# Altium PCB Sender.PcbDoc
Units mm, origin at the board's own origin, x right, y up, seen from the top; angles counter-clockwise.
Board outline 44.7 x 21.02 mm, 2 copper layers (Top Layer, Bottom Layer), stack 1.569 mm thick; 64 components, 31 nets, 185 pads, 451 vias.
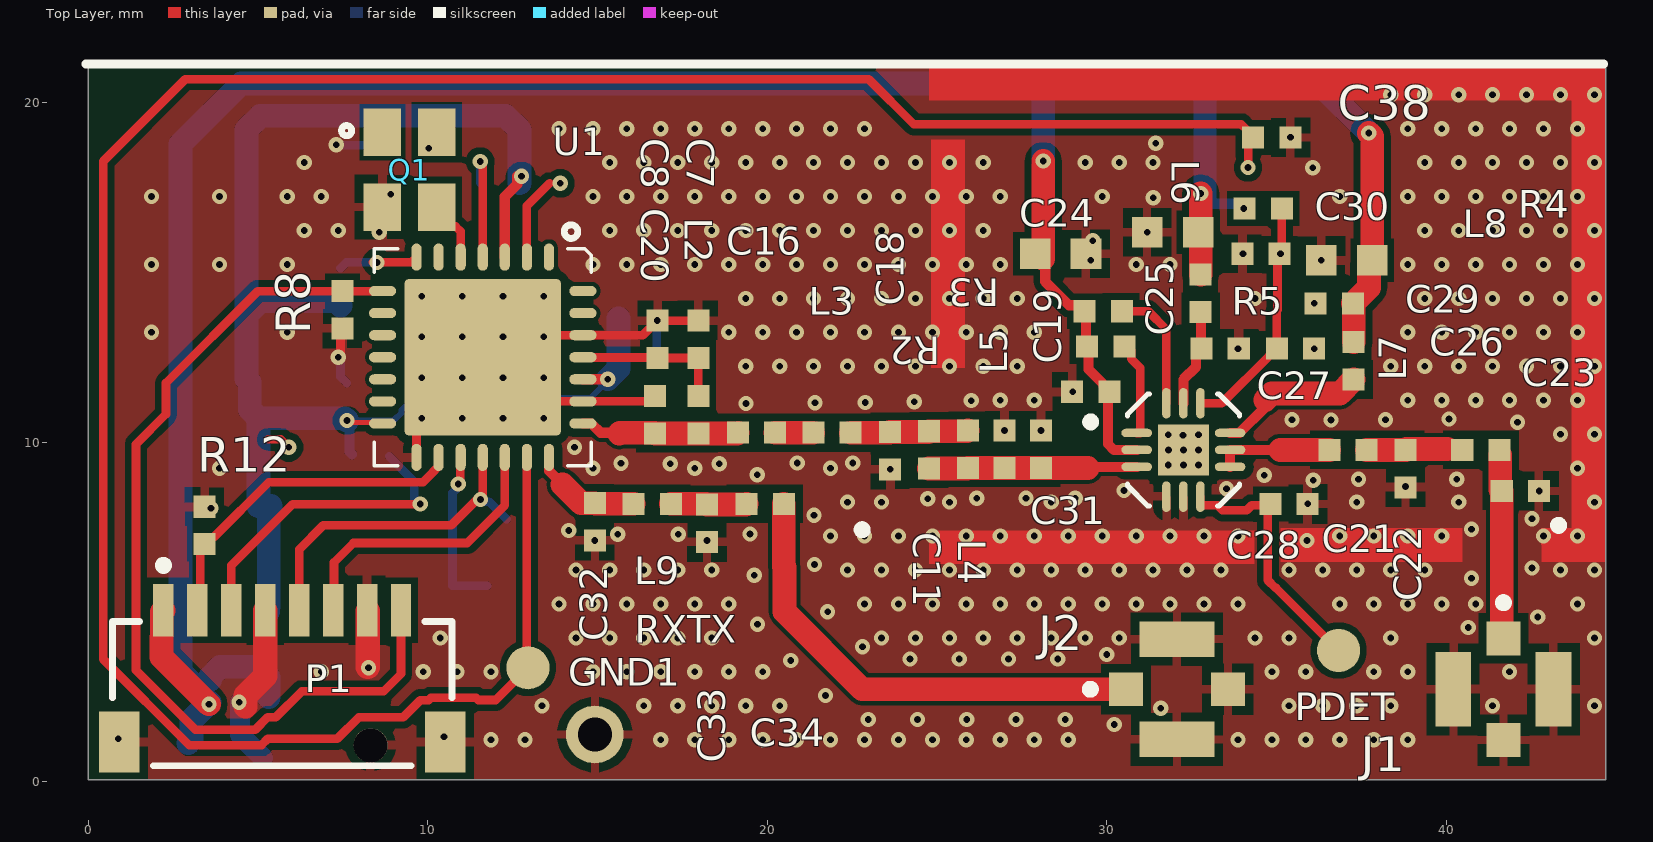
[diagram p0: Top Layer view]
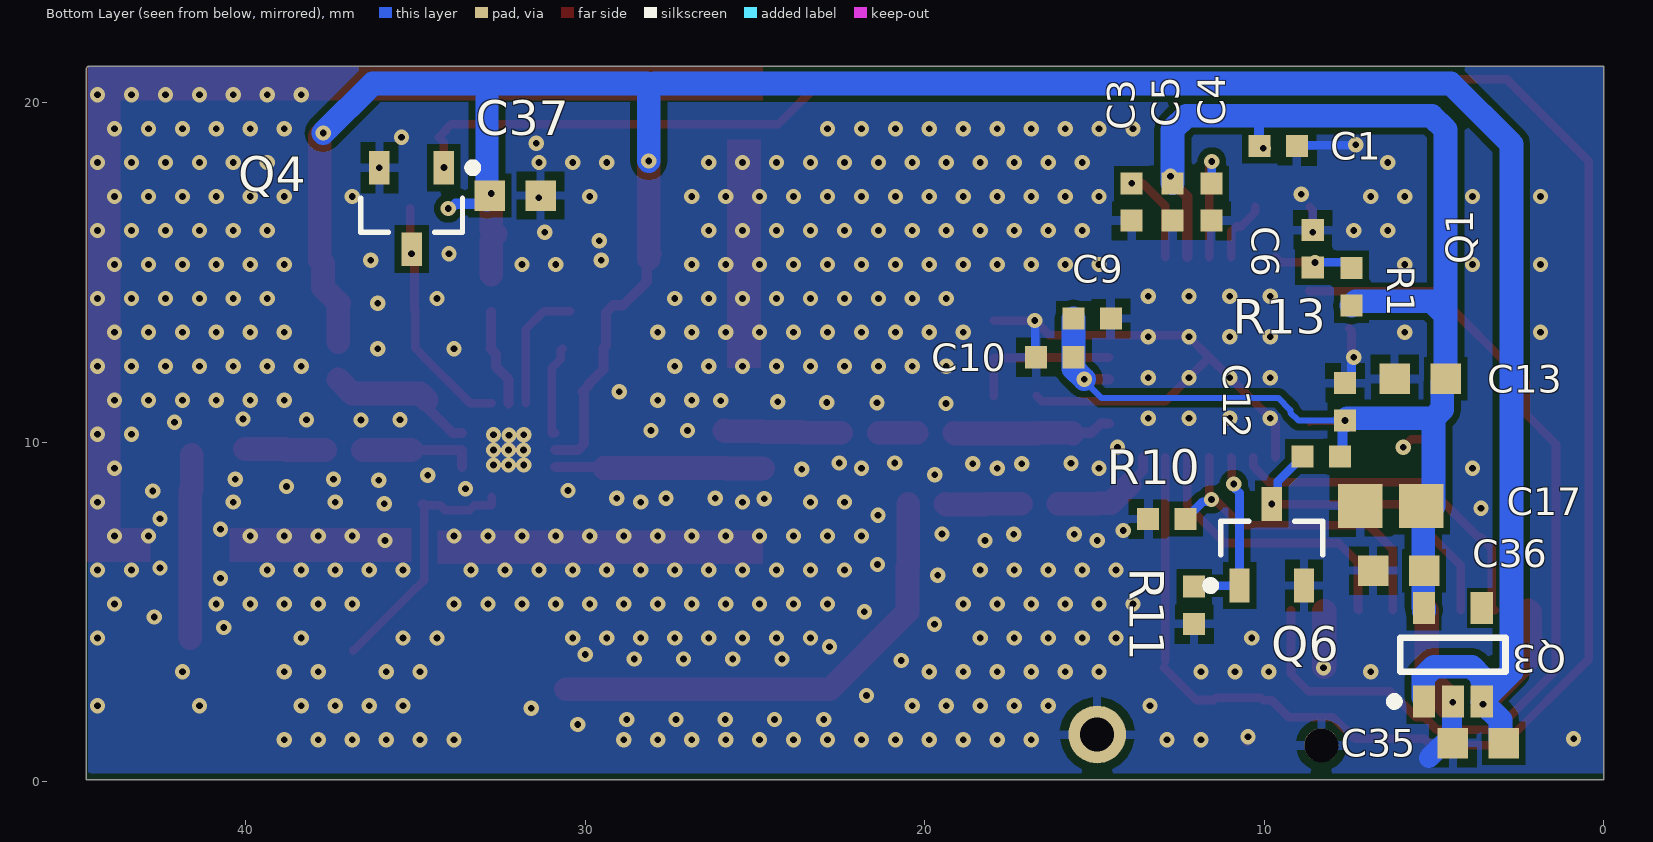
[diagram p1: Bottom Layer view, seen from below]

## Layer stack, top to bottom
Top Solder: solder mask 0.0254, SM-001, Dk 4
Top Layer: signal copper 0.035
Dielectric 1: core 1.4986, Core-043, Dk 4.3
Bottom Layer: signal copper 0.035
Bottom Solder: solder mask 0.0254, SM-001, Dk 4

## Board outline
0,0.064 0,21.082 44.64,21.082 44.704,21.018 44.704,0.064

## Design rules (kind name [scope] priority, off if disabled: settings)
Clearance Clearance_5 [InNetClass('RF') vs InNet('NetC28_1')] p1: gap=0.2 ignorepadtopadclearanceinfootprint=TRUE
Clearance Clearance_4 [InNetClass('RF') vs InNet('VDD_RFS')] p2: gap=0.2 ignorepadtopadclearanceinfootprint=TRUE
Clearance Clearance_3 [HasFootprint('vqfn28_6x6mm') vs InNet('VDD_RFS')] p3: gap=0.2 ignorepadtopadclearanceinfootprint=TRUE
Clearance Clearance_2 [((Not InAnyNet) And IsPad) vs InNet('GND')] p4: gap=0.12 ignorepadtopadclearanceinfootprint=FALSE
Clearance [InNetClass('RF') vs InNet('GND')] p5: gap=0.12 ignorepadtopadclearanceinfootprint=TRUE
Clearance Clearance_1 [All] p6: gap=0.175 ignorepadtopadclearanceinfootprint=TRUE
HoleToHoleClearance [All] p1: gap=0.1 allowstackedmicrovias=TRUE
MinimumSolderMaskSliver [All] p1: minsoldermaskwidth=0
PlaneClearance [InNetClass('RF')] p1: clearance=0.12
PolygonConnect PolygonConnect_1 [IsVia vs InNet('GND')] p1: connectstyle=Direct reliefconductorwidth=0.254 reliefentries=4 polygonreliefangle="90 Angle" airgapwidth=0.254
PolygonConnect [All] p2: connectstyle=Relief reliefconductorwidth=0.254 reliefentries=4 polygonreliefangle="90 Angle" airgapwidth=0.254
RoutingVias [All] p1: holewidth=0.198 width=0.45 viastyle="Through Hole" minholewidth=0.198 minwidth=0.45 maxholewidth=0.6 maxwidth=1.2
SilkToSilkClearance [All] p1: silktosilkclearance=0.1
SilkToSolderMaskClearance [IsPad] p1: minsilkscreentomaskgap=0.1 clearancetoexposedcopper=TRUE
SolderMaskExpansion SolderMaskExpansion_1 [IsVIA] p1: expansion=0.102 istentingtop=TRUE
SolderMaskExpansion [All] p2: expansion=0.102 istentingtop=FALSE
Width Width_1 [InNetClass('RF')] p1: maxlimit=1.27 minlimit=0.1 preferedwidth=0.7 minimp=50.000000 maximp=50.000000 favimp=50.000000
Width Width_2 [InNetClass('POW')] p2: maxlimit=1.27 minlimit=0.15 preferedwidth=0.3
Width [All] p3: maxlimit=1.27 minlimit=0.254 preferedwidth=0.254
25 further rules are at their usual default settings.

## Classes and differential pairs
net class RF: NetC11_1 NetC11_2 NetC16_1 NetC16_2 NetC21_1 NetC21_2 NetC23_2 NetC26_1 NetC32_2 NetC33_2 NetC34_1 NetL7_1
net class POW: 3V3 5V

## Components (designator, comment, footprint, x,y, rotation, side; value= is the part's Value field where it differs from the comment)
C1 "Cap" rlc_402_smd#1 9.588,18.732 r0 bottom value=10nF
C3 "Cap" rlc_402_smd#1 13.906,17.081 r90 bottom value=100nF
C4 "Cap" rlc_402_smd#1 11.557,17.081 r90 bottom value=100nF
C5 "Cap" rlc_402_smd#1 12.7,17.081 r90 bottom value=100nF
C6 "Cap" rlc_402_smd#1 8.572,15.706 r90 bottom value=1nF
C7 "Cap" rlc_402_smd#1 17.97,13.039 r270 top value=10nF
C8 "Cap" rlc_402_smd#1 16.764,13.039 r270 top value=100pF
C9 "Cap" rlc_402_smd#1 15.071,13.652 r0 bottom value=100pF
C10 "Cap" rlc_402_smd#1 16.171,12.509 r180 bottom value=100nF
C11 "Cap" rlc_402_smd#1 24.765,9.779 r90 top value=4.7pF
C12 "Cap" rlc_402_smd#1 7.62,11.198 r270 bottom value=100nF
C13 "Cap Semi" rlc_603_smd#1 5.409,11.874 r180 bottom value=1uF
C16 "Cap" rlc_402_smd#1 19.685,10.287 r180 top value=33pF
C17 "Cap" rlc_805_smd 6.275,8.128 r180 bottom value=10uF
C18 "Cap" rlc_402_smd#1 23.622,9.757 r90 top value=4.7pF
C19 "Cap" rlc_402_smd#1 28.067,9.801 r270 top value=12pF
C20 "Cap" rlc_402_smd#1 16.7,10.817 r270 top value=3.3pF
C21 "Cap" rlc_402_smd#1 37.106,9.779 r180 top value=220pF
C22 "Cap" rlc_402_smd#1 38.798,9.229 r90 top value=4.7pF
C23 "Cap" rlc_402_smd#1 42.186,8.572 r180 top value=10pF
C24 "Cap" rlc_603_smd#1 28.639,15.557 r0 top value=1uF
C25 "Cap" rlc_603_smd#1 31.941,16.192 r0 top value=1uF
C26 "Cap" rlc_402_smd#1 33.337,12.763 r0 top value=3.3pF
C27 "Cap" rlc_402_smd#1 35.56,12.763 r180 top value=100pF
C28 "Cap" rlc_402_smd#1 35.369,8.191 r180 top value=100pF
C29 "Cap" rlc_402_smd#1 36.703,14.097 r0 top value=1nF
C30 "Cap" rlc_603_smd#1 37.072,15.367 r0 top value=4.7uF
C31 "Cap" rlc_402_smd#1 29.527,11.493 r0 top value=100pF
C32 "Cap" rlc_402_smd#1 14.922,7.662 r90 top value=4.7pF
C33 "Cap" rlc_402_smd#1 18.224,7.62 r90 top value=10pF
C34 "Cap" rlc_402_smd#1 19.939,8.191 r180 top value=220pF
C35 "Cap Semi" rlc_603_smd#2 3.695,1.143 r180 bottom value=1uF
C36 "Cap Semi" rlc_603_smd#2 6.044,6.223 r180 bottom value=1uF
C37 "Cap" rlc_603_smd#2 32.067,17.272 r180 bottom value=1uF
C38 "Cap" rlc_402_smd#2 34.861,18.986 r0 top value=100pF
GND1 "Test Pin" pin_1mm 14.922,1.397 r90 top
J1 "73412-0110" MOLX-73412-0110_V 41.685,2.73 r180 top
J2 "73412-0110" MOLX-73412-0110_V 32.067,2.73 r270 top
L2 "Inductor" rlc_402_smd#1 17.97,10.817 r90 top value=33nH
L3 "Inductor" rlc_402_smd#1 21.907,10.287 r0 top value=1.85nH
L4 "Inductor" rlc_402_smd#1 25.908,9.801 r270 top value=2.2nH
L5 "Inductor" rlc_402_smd#2 26.987,9.801 r270 top value=5.6nH
L6 "Inductor" rlc_402_smd#2 32.766,14.393 r270 top value=12nH
L7 "Inductor" rlc_402_smd#1 37.274,12.404 r90 top value="22nH 2285626"
L8 "Inductor" rlc_402_smd#2 41.021,9.779 r0 top value=1.85nH
L9 "Inductor" rlc_402_smd#2 16.615,8.191 r0 top value=2.2nH
P1 "SM08B-SRSS-TB(LF)(SN)" JST-SM08B-SRSS-TB_V 5.715,2.603 r0 top
PDET "Test Pin" pin_SMD 36.83,3.873 r90 top
Q1 "I537" nd3225da 9.461,18.034 r270 top
Q3 "TPS70936" SOT-23-5 4.445,3.746 r90 bottom
Q4 "IRFML8244TRPbF" SOT23_MOSFET 35.115,16.891 r270 bottom
Q6 "IRFML8244TRPbF" SOT23_MOSFET 9.779,6.985 r90 bottom
R1 "Resistor" rlc_402_smd#1 7.429,14.583 r270 bottom value=100R
R2 "Resistor" rlc_402_smd#2 29.972,12.827 r180 top value=1.8k
R3 "Resistor" rlc_402_smd#2 29.898,13.863 r180 top value=2k
R4 "Resistor" rlc_402_smd#1 34.608,16.891 r180 top value=1k
R5 "Resistor" rlc_402_smd#2 34.544,15.557 r0 top value=1k
R8 "Resistor" rlc_402_smd#2 7.493,13.906 r270 top value=200R
R10 "Resistor" rlc_402_smd#2 12.869,7.747 r0 bottom value=200R
R11 "Resistor" rlc_402_smd#2 12.065,5.207 r270 bottom value=200R
R12 "Resistor" rlc_402_smd#2 3.429,7.556 r90 top value=200R
R13 "Resistor" rlc_402_smd#2 8.319,9.588 r0 bottom value=100R
RXTX "Test Pin" pin_SMD 12.954,3.365 r90 top
U1 "SX1276" vqfn28_6x6mm 11.62,12.509 r270 top

## Footprints (in the part's own frame and the unit in brackets; to place one, negate y for a bottom-side part, rotate by r counter-clockwise, add the part's x,y. Pads: shape width x height; smd on the part's side, far side on the other; paste and mask are expansions set on the pad)
JST-SM08B-SRSS-TB_V [mm] "SMD, 8-Leads, Body 10x4.25mm, Pitch 1mm"
  rect 0.6x1.55 smd: 1(-3.5,2.45) 2(-2.5,2.45) 3(-1.5,2.45) 4(-0.5,2.45) 5(0.5,2.45) 6(1.5,2.45) 7(2.5,2.45) 8(3.5,2.45)
  rect 1.2x1.8 smd: MP1(-4.8,-1.425) MP2(4.8,-1.425)
  silkscreen extent -5,-2.12 5,3.9, body extent -5,-2.12 5,2.83, height 2.96
MOLX-73412-0110_V [mm] "MCRF, 4-Leads, Body 2.6x2.6mm"
  rect 1x1 smd: 1(0,-1.5) 3(0,1.5)
  rect 1.05x2.2 smd: 2(-1.475,0) 4(1.475,0)
  silkscreen extent -0.13,-2.67 0.12,-2.43, body extent -1.3,-1.3 1.3,1.3, height 1.3
nd3225da [mm] "Crystal SMD 3.2x2.5mm"
  rect 1.4x1.1 smd mask+0.05: 1(-1.1,-0.8) 2(1.1,-0.8) 3(1.1,0.8) 4(-1.1,0.8)
  silkscreen extent -1.3,-2 -1,-1.7, body extent -1.6,-1.25 1.6,1.25, height 1
pin_1mm [mm] "Generic Pin 1.1mm; 1 Lead"
  round 1.7 hole 1: 1(0,0)
pin_SMD [mm] "Generic Pin; 1 pin SMD"
  round 1.27 smd: 1(0,0)
rlc_402_smd#1 [mm] "Chip SMD component 402; Body 1.0 x 0.5 mm (LxW typ)"
  rect 0.65x0.65 smd: 1(-0.55,0) 2(0.55,0)
rlc_402_smd#2 [mm] "Chip SMD component 402; Body 1.0 x 0.5 mm (LxW typ)"
  rect 0.65x0.65 smd mask+0.05: 1(-0.55,0) 2(0.55,0)
rlc_603_smd#1 [mm] "Chip SMD component 603; Body 1.6 x 0.8mm (LxW typ)"
  rect 0.9x0.9 smd: 1(-0.75,0) 2(0.75,0)
rlc_603_smd#2 [mm] "Chip SMD component 603; Body 1.6 x 0.8mm (LxW typ)"
  rect 0.9x0.9 smd paste+0 mask+0.05: 1(-0.75,0) 2(0.75,0)
rlc_805_smd [mm] "Chip SMD component 805; Body 2.0 x 1.25 mm (LxW typ)"
  rect 1.3x1.3 smd: 1(-0.9,0) 2(0.9,0)
SOT23_MOSFET [mm] "SOT23, 3-Leads, Body 2.92x2.37mm, Pitch 0.95mm, IPC Medium Density"
  rect 1x0.6 smd: D(1.2,0) G(-1.2,0.95) S(-1.2,-0.95)
  silkscreen extent -1.32,-1.5 0.7,1.92, body extent -0.7,-1.52 0.7,1.52, height 1.12
SOT-23-5 [mm] "SOT23, 5-Leads, Body 2.90x2.79mm, Pitch 0.85mm, IPC Medium Density"
  rect 0.95x0.65 smd: 1(-1.375,0.85) 2(-1.375,0) 3(-1.375,-0.85) 4(1.375,-0.85) 5(1.375,0.85)
  silkscreen extent -1.5,-1.55 0.5,1.85, body extent -0.9,-1.55 0.9,1.55, height 1.3
vqfn28_6x6mm [mm] "28 Leads, Body 6.0x6.0mm, Pitch 0.65mm, VQFN28"
  oval 0.8x0.3 smd: 1(-2.95,1.95) 2(-2.95,1.3) 3(-2.95,0.65) 4(-2.95,0) 5(-2.95,-0.65) 6(-2.95,-1.3) 7(-2.95,-1.95) 15(2.95,-1.95) 16(2.95,-1.3) 17(2.95,-0.65) 18(2.95,0) 19(2.95,0.65) 20(2.95,1.3) 21(2.95,1.95)
  oval 0.3x0.8 smd: 8(-1.95,-2.95) 9(-1.3,-2.95) 10(-0.65,-2.95) 11(0,-2.95) 12(0.65,-2.95) 13(1.3,-2.95) 14(1.95,-2.95) 22(1.95,2.95) 23(1.3,2.95) 24(0.65,2.95) 25(0,2.95) 26(-0.65,2.95) 27(-1.3,2.95) 28(-1.95,2.95)
  rrect5% 4.6x4.6 smd: 29(0,0)
  Mechanical 15 keep-out lines w0.1: 3.5,-3.5 3.5,3.5 -3.5,3.5 -3.5,-3.5 3.5,-3.5
  silkscreen extent -3.9,-3.2 3.2,3.2, body extent -3,-3 3,3, height 1

## Part data
C1 C3 C4 C5 C6 C7 C8 C9 C10 C11 C12 C16 C17 C18 C19 C20 C21 C22 C23 C24 C25 C26 C27 C28 C29 C30 C31 C32 C33 C34 C37 C38: "Capacitor SMD", LatestRevisionDate="05-oct-2007  -  Semtech", LatestRevisionNote="Re-released for DXP Platform.", Published=8-Jun-2000, Publisher="Altium Limited"
C13 C35 C36: "Capacitor (Semiconductor SIM Model)", LatestRevisionDate="05-oct-2007  -  Semtech", LatestRevisionNote="Re-released for DXP Platform.", Published=8-Jun-2000, Publisher="Altium Limited"
GND1 PDET RXTX: library part test_pin, LatestRevisionDate="05-oct-2007  -  Semtech"
J1 J2: library part CMP-1676-00003-1, "MCRF, PCB Vertical Jack Receptacle, 50 Ohm, 4-Pin SMD, RoHS, Tape and Reel", Frequency="6 Hz", Max Operating Temperature="90 degC", Min Operating Temperature="-40 degC", Package Quantity=5000, Voltage Rating="60 V", ComponentLink1Description="Manufacturer URL", ComponentLink1URL=http://www.molex.com/, ComponentLink2Description=Datasheet, ComponentLink2URL=http://www.molex.com/webdocs/datasheets/pdf/en-us/0734120110_RF_COAX_CONNECTORS.pdf, ComponentLink3Description="Package Specification", ComponentLink3URL=http://www.molex.com/pdm_docs/sd/734120110_sd.pdf, Contact Material=Bronze, Contact Plating=Gold, DatasheetVersion=04/2016, Gender=Female, Height="1.25 mm", Impedance="50 Ohm", Length="3 mm", Mating Cycles=30, Mount="Surface Mount", Mounting Technology="Surface Mount", PackageDescription="4-Leads SMD, Body 2.6 x 2.6 mm", PackageReference=73412-0110, PackageVersion="Rev. C14, 07/2015", Packaging="Tape and Reel", Radiation Hardening=No, REACH SVHC=Unknown, RoHSCompliant=true, Voltage Rating (AC)="60 V", Width="3 mm"
L2 L3 L4 L5 L6 L7 L8 L9: "Inductor SMD", Code_IEC=1005, Code_JEITA=0402, LatestRevisionDate="05-oct-2007  -  Semtech", LatestRevisionNote="Re-released for DXP Platform.", Published=8-Jun-2000, Publisher="Altium Limited"
P1: library part CMP-2000-07082-1, "Male Header, Pitch 1 mm, 1 x 8 Position, Height 2.95 mm, -25 to 85 degC, RoHS, Tape and Reel", Manufacturer=JST, Package Description="Male Header, Pitch 1 mm, 1 x 8 Position, Height 2.95 mm", Package Reference=SM08B-SRSS-TB, Datasheet URL=http://www.jst-mfg.com/product/pdf/eng/eSR.pdf, Datasheet Version=11/2010, Manufacturer URL=http://www.jst.com/home2.html, Mounting Technology=SurfaceMount, No of Positions=8, Pitch=1mm, Style/Orientation=RightAngleHeader/Plug, Termination=Crimp, Type=ShroudedHeader
Q1: library part TCXO, "Termally Compensated External Oscillator"
Q3: library part RT9086
Q4 Q6: library part MOSFET-N, "N-Channel MOSFET", LatestRevisionDate=17-Jul-2002, LatestRevisionNote="Re-released for DXP Platform.", PackageDescription="TO, Flat Index; 3 In-Line, Axial Leads; Body Dia. 4.6mm; Lead Dia. 0.5 mm (max)", PackageReference=E3, PackageVersion=1995/1996, Published=8-Jun-2000, Publisher="Altium Limited"
R1 R2 R3 R4 R5 R8 R10 R11 R12 R13: "Resistor SMD - IEC symbol version", LatestRevisionDate="27-Jul-20  -  Semtech"
U1: "SX1276 - Low Power Integrated UHF Transceiver with loRa Modem", LatestRevisionDate="27-Jul-2009 -  Semtech"

## Free pads (board coordinates)
  oval 0.9x0.25 smd: 1(30.883,10.279) 2(30.883,9.779) 3(30.883,9.279) 7(33.633,9.279) 8(33.633,9.779) 9(33.633,10.279)
  oval 0.25x0.9 smd: 4(31.758,8.404) 5(32.258,8.404) 6(32.758,8.404) 10(32.758,11.154) 11(32.258,11.154) 12(31.758,11.154)
  round 1 hole 1 paste+1 mask+0.102: 6(8.319,1.079)
  rect 1.5x1.5 smd: 13(32.258,9.779)

## Via types
v1: diameter 0.45, hole 0.198, Top Layer to Bottom Layer, tented both sides, 451 vias

## Nets (pads, with @x,y where several pads share a name; then routed paths per layer and width w, separated by ;. In a path a pad name is that pad's centre, name@x,y a point inside that pad or via, vN(x,y) a via of type N, cw(c..) or ccw(c..) an arc to the next point about the centre after c; other vN are vias at no path point)
3V3: C1.2 C5.2 C9.2 C10.2 C12.2 C13.2 C17.2 C36.2 Q1.4 Q3.5 R1.2 R13.1 U1.3 U1.14 U1.24 | length 46.9
  Top Layer w0.15: v1(7.62,10.648) 7.679,10.588 8.642,10.588 U1.14
  Top Layer w0.3: U1.3 12.271,17.241 12.636,17.607 v1@12.636,17.843 ; U1.24 15.301,11.859 v1(15.303,11.862)
  Bottom Layer w0.18: v1(7.62,10.648) 8.997,10.648 9.231,10.882 9.231,10.954 9.589,11.312 14.8,11.312 15.303,11.816 v1(15.303,11.862)
  Bottom Layer w0.3: v1(7.62,10.648) 7.694,10.573 7.694,9.726 R13.1@7.769,9.652 ; v1(10.033,18.669) 10.16,18.796 10.16,19.621
  Bottom Layer w0.7: Q3.5@5.295,5.022 Q3.5 5.32,5.146 5.32,6.223 5.32,8.073 C17.2 5.016,8.128 5.016,10.71 ; R1.2 7.305,14.158 6.835,14.158 6.833,14.16 5.07,14.16 4.659,13.75 ; v1(7.62,10.648) 7.558,10.71 5.016,10.71 ; C5.2 12.7,17.843 12.7,19.211 12.29,19.621 10.16,19.621 5.07,19.621 4.659,19.211 4.659,13.75 ; v1(15.303,11.862) 15.621,12.18 C10.2 C9.2 ; 4.659,13.75 C13.2 4.759,11.775 4.759,10.967 5.016,10.71
  other v1: 12.763,17.843
5V: C24.1 C25.2 C29.2 C30.2 C31.2 C35.2 C37.1 L6.1 L7.2 P1.1 pad.2 Q3.1 Q3.3 R2.2 R3.2 R4.2 | length 85.8
  Top Layer w0.3: C24.1 28.189,15.257 28.189,14.737 28.888,14.038 29.173,14.038 R3.2 29.385,13.827 29.385,12.864 R2.2 29.464,12.785 29.464,12.152 29.902,11.713 29.902,11.669 C31.2 30.035,11.452 30.035,9.955 30.211,9.779 pad.2
  Top Layer w0.7: P1.1 2.165,5.003 2.165,4.269 2.159,4.263 2.159,3.683 v1(3.556,2.286) ; C24.1@28.13,15.408 v1(28.13,18.288) ; C25.2@32.639,16.141 C25.2 32.766,16.268 v1(32.766,17.335) ; L6.1 C25.2@32.766,15.951 ; L7.2 37.274,14.075 C29.2 37.722,14.566 37.722,15.267 C30.2 37.822,19.01 v1(37.719,19.113)
  Bottom Layer w0.3: C37.1@32.893,17.145 32.974,17.145 33.089,17.03 33.816,17.03 33.955,16.891 v1(34.036,16.891)
  Bottom Layer w0.686: C37.1@32.893,17.145 32.893,20.13
  Bottom Layer w0.7: C35.2 3.045,1.243 3.045,1.821 Q3.3@3.57,2.346 ; Q3.3@3.365,2.601 2.72,3.247 2.72,18.785 4.508,20.574 27.956,20.574 28.13,20.399 v1(28.13,18.288) ; 3.595,3.01 3.595,3.099 3.892,3.397 4.998,3.397 5.32,3.074 Q3.1@5.32,2.496 ; 28.194,20.574 36.258,20.574 v1(37.719,19.113)
DIO0: P1.8 R8.1 U1.8 | length 27.4
  Top Layer w0.254: U1.8 8.669,14.458 7.495,14.458 R8.1 4.995,14.456 2.293,11.754 2.293,10.834 1.406,9.948 1.406,3.293 3.159,1.54 4.918,1.54 5.283,1.905 5.524,1.905 6.286,2.667 8.7,2.667 9.215,3.183 P1.8
GND: C1.1 C3.1 C4.1 C5.1 C6.2 C7.1 C8.1 C9.1 C10.1 C12.1 C13.1 C17.1 C18.1 C19.1 C20.1 C22.1 C23.1 C24.2 C25.1 C26.2 C27.1 C28.1 C29.1 C30.1 C31.1 C32.1 C33.1 C35.1 C36.1 C37.2 C38.2 GND1.1 J1.2 J1.3 J1.4 J2.2 J2.3 J2.4 L5.1 P1.4 P1.7 P1.MP1 P1.MP2 pad.4 pad.5 pad.6@8.319,1.079 pad.13 Q1.2 Q3.2 Q4.S Q6.S R5.1 R8.2 R10.2 R11.2 R12.2 U1.15 U1.23 U1.26 U1.29 | length 29.8
  Top Layer w0.254: v1(0.889,1.27) 0.915,1.244 P1.MP1 ; v1(7.366,12.509) 7.429,12.573 7.429,13.293 R8.2 ; P1.7 P1.7@8.235,5.034 ; v1@8.235,3.385 v1(8.255,3.365) ; v1(8.572,16.192) 8.572,16.845 Q1.2 ; Q1.2@8.886,17.309 v1(8.908,17.309) ; U1.15 9.671,10.56 v1(9.821,10.71) v1(11.021,11.91) U1.29 ; v1(10.477,1.333) 10.477,1.216 P1.MP2 ; C20.1 16.552,11.218 14.579,11.218 U1.23 12.92,11.21 v1(12.22,11.91) U1.29 ; C7.1 v1(16.764,13.589) 16.335,13.16 U1.26 12.271,13.16 v1(12.22,13.109) U1.29 ; C33.1 v1(18.224,7.112) ; C31.1 v1(28.998,11.493) ; v1(31.821,9.781) 31.823,9.779 v1(32.258,9.779) 32.248,9.789 v1(32.248,10.214) ; v1(33.867,12.763) C26.2 ; R5.1 v1(34.014,15.557) ; v1@35.856,7.112 v1(35.899,7.112) ; v1(36.11,14.097) C29.1 ; C22.1 v1(38.798,8.7)
  Top Layer w0.711: 4.635,2.222 4.635,2.54 5.215,3.119 P1.4 ; v1@8.235,3.385 P1.7@8.235,5.034
  Bottom Layer w0.254: v1(7.302,18.771) 7.322,18.752 9.019,18.752 C1.1 ; v1(7.366,12.509) 7.432,12.443 7.432,11.935 C12.1 ; v1(8.572,16.192) C6.2 ; C10.1 16.742,12.531 16.742,13.567 v1(16.764,13.589)
  Bottom Layer w0.6: Q3.2@4.47,2.346 4.47,1.387 5.149,0.708
  other v1: 11.866,1.243 12.866,1.243 16.866,1.243 17.866,1.243 18.866,1.243 19.866,1.243 20.866,1.243 21.866,1.243 22.866,1.243 23.866,1.243 24.866,1.243 25.866,1.243 26.866,1.243 27.866,1.243 28.866,1.243 33.866,1.243 34.866,1.243 35.866,1.243 36.866,1.243 37.866,1.243 38.866,1.243 30.22,1.695 22.979,1.839 24.429,1.839 25.879,1.839 27.328,1.839 28.778,1.839 31.59,2.169 13.366,2.243 16.366,2.243 17.366,2.243 18.366,2.243 19.366,2.243 20.366,2.243 35.366,2.243 36.366,2.243 37.366,2.243 38.366,2.243 41.366,2.243 44.366,2.243 4.445,2.349 21.716,2.549 6.866,3.243 9.866,3.243 10.866,3.243 11.866,3.243 14.866,3.243 15.866,3.243 16.866,3.243 17.866,3.243 18.866,3.243 19.866,3.243 34.866,3.243 35.866,3.243 37.866,3.243 38.866,3.243 41.866,3.243 20.691,3.574 24.207,3.622 25.657,3.622 27.107,3.622 28.556,3.622 30,3.752 22.804,3.985 10.366,4.243 14.366,4.243 15.366,4.243 16.366,4.243 17.366,4.243 18.366,4.243 23.366,4.243 24.366,4.243 25.366,4.243 26.366,4.243 27.366,4.243 28.366,4.243 29.366,4.243 30.366,4.243 34.366,4.243 35.366,4.243 38.366,4.243 44.366,4.243 40.65,4.55 19.711,4.643 42.694,4.862 21.779,5.01 13.866,5.243 14.866,5.243 15.866,5.243 16.866,5.243 17.866,5.243 18.866,5.243 22.866,5.243 23.866,5.243 24.866,5.243 25.866,5.243 26.866,5.243 27.866,5.243 28.866,5.243 29.866,5.243 30.866,5.243 31.866,5.243 32.866,5.243 33.866,5.243 36.866,5.243 37.866,5.243 38.866,5.243 39.866,5.243 40.866,5.243 43.866,5.243 40.744,5.997 19.619,6.089 14.366,6.243 15.366,6.243 16.366,6.243 17.366,6.243 18.366,6.243 22.366,6.243 23.366,6.243 24.366,6.243 25.366,6.243 26.366,6.243 27.366,6.243 28.366,6.243 29.366,6.243 30.366,6.243 31.366,6.243 32.366,6.243 33.366,6.243 35.366,6.243 36.366,6.243 37.366,6.243 38.366,6.243 39.366,6.243 43.366,6.243 44.366,6.243 42.527,6.302 21.392,6.407 14.922,7.112 21.866,7.243 22.866,7.243 23.866,7.243 24.866,7.243 25.866,7.243 26.866,7.243 27.866,7.243 28.866,7.243 29.866,7.243 30.866,7.243 31.866,7.243 32.866,7.243 33.866,7.243 36.866,7.243 37.866,7.243 38.866,7.243 39.866,7.243 42.866,7.243 43.866,7.243 15.6,7.3 17.377,7.3 19.494,7.302 14.155,7.409 40.744,7.446 42.527,7.752 21.381,7.856 3.619,8.064 35.919,8.191 22.366,8.243 23.366,8.243 25.366,8.243 28.366,8.243 37.366,8.243 40.366,8.243 44.366,8.243 24.725,8.345 26.174,8.359 27.624,8.359 29.073,8.359 30.506,8.582 42.735,8.572 33.528,8.636 36.083,8.887 37.413,8.919 40.311,8.919 34.641,9.032 19.704,9.052 23.622,9.207 3.866,9.243 14.866,9.243 17.866,9.243 21.866,9.243 43.866,9.243 31.813,9.335 32.258,9.335 32.703,9.335 15.691,9.385 17.14,9.375 18.59,9.375 20.885,9.395 22.523,9.395 32.703,9.779 14.322,9.862 31.813,10.223 32.703,10.223 43.366,10.243 44.366,10.243 26.987,10.351 28.067,10.351 42.101,10.598 36.607,10.661 35.458,10.671 38.208,10.671 40.084,10.688 11.021,10.71 12.22,10.71 13.42,10.71 19.373,11.147 21.409,11.169 22.884,11.179 24.333,11.199 26.012,11.232 26.866,11.243 27.866,11.243 38.866,11.243 39.866,11.243 40.866,11.243 41.866,11.243 42.866,11.243 43.866,11.243 9.821,11.91 13.42,11.91 19.366,12.243 20.366,12.243 21.366,12.243 22.366,12.243 23.366,12.243 24.366,12.243 25.366,12.243 26.366,12.243 27.366,12.243 38.366,12.243 39.366,12.243 40.366,12.243 41.366,12.243 42.366,12.243 43.366,12.243 44.366,12.243 36.11,12.763 9.821,13.109 11.021,13.109 13.42,13.109 1.866,13.243 5.866,13.243 18.866,13.243 19.866,13.243 20.866,13.243 21.866,13.243 22.866,13.243 23.866,13.243 24.866,13.243 25.866,13.243 26.866,13.243 27.866,13.243 38.866,13.243 39.866,13.243 40.866,13.243 41.866,13.243 42.866,13.243 43.866,13.243 19.366,14.243 20.366,14.243 21.366,14.243 22.366,14.243 23.366,14.243 24.366,14.243 25.366,14.243 26.366,14.243 27.366,14.243 34.366,14.243 39.366,14.243 40.366,14.243 41.366,14.243 42.366,14.243 43.366,14.243 44.366,14.243 9.821,14.309 11.021,14.309 12.22,14.309 13.42,14.309 1.866,15.243 3.866,15.243 5.866,15.243 14.866,15.243 15.866,15.243 16.866,15.243 17.866,15.243 18.866,15.243 19.866,15.243 20.866,15.243 21.866,15.243 22.866,15.243 23.866,15.243 24.866,15.243 25.866,15.243 26.866,15.243 30.866,15.243 31.866,15.243 38.866,15.243 39.866,15.243 40.866,15.243 41.866,15.243 42.866,15.243 43.866,15.243 29.527,15.367 36.322,15.367 29.591,15.938 31.19,16.192 6.366,16.243 7.366,16.243 15.366,16.243 16.366,16.243 17.366,16.243 18.366,16.243 19.366,16.243 20.366,16.243 21.366,16.243 22.366,16.243 23.366,16.243 24.366,16.243 25.366,16.243 26.366,16.243 39.366,16.243 40.366,16.243 41.366,16.243 42.366,16.243 43.366,16.243 44.366,16.243 31.369,17.209 1.866,17.243 3.866,17.243 5.866,17.243 6.866,17.243 14.866,17.243 15.866,17.243 16.866,17.243 17.866,17.243 18.866,17.243 19.866,17.243 20.866,17.243 21.866,17.243 22.866,17.243 23.866,17.243 24.866,17.243 25.866,17.243 26.866,17.243 29.866,17.243 36.866,17.243 38.866,17.243 39.866,17.243 40.866,17.243 41.866,17.243 42.866,17.243 43.866,17.243 36.065,18.091 6.366,18.243 15.366,18.243 16.366,18.243 17.366,18.243 18.366,18.243 19.366,18.243 20.366,18.243 21.366,18.243 22.366,18.243 23.366,18.243 24.366,18.243 25.366,18.243 26.366,18.243 29.366,18.243 30.366,18.243 31.366,18.243 39.366,18.243 40.366,18.243 41.366,18.243 42.366,18.243 43.366,18.243 44.366,18.243 31.444,18.816 35.411,18.986 13.866,19.243 14.866,19.243 15.866,19.243 16.866,19.243 17.866,19.243 18.866,19.243 19.866,19.243 20.866,19.243 21.866,19.243 22.866,19.243 38.866,19.243 39.866,19.243 40.866,19.243 41.866,19.243 42.866,19.243 43.866,19.243 38.366,20.243 39.366,20.243 40.366,20.243 41.366,20.243 42.366,20.243 43.366,20.243 44.366,20.243
MISO: Q6.G R11.1 U1.17 | length 4.9
  Top Layer w0.254: v1(10.899,8.773) 10.962,8.836 10.962,9.551 U1.17
  Bottom Layer w0.254: v1(10.899,8.773) 10.899,8.68 10.729,8.51 Q6.G 10.736,5.779 R11.1@11.747,5.779
MISO_N: P1.3 Q6.D R13.2 | length 9.4
  Top Layer w0.254: P1.3 4.215,6.374 6.026,8.185 v1(9.779,8.185)
  Bottom Layer w0.254: R13.2 9.606,8.851 9.606,8.358 v1(9.779,8.185)
MOSI: P1.5 R10.1 U1.18 | length 9.8
  Top Layer w0.254: P1.5 6.215,6.85 6.923,7.558 10.692,7.558 v1@11.505,8.371 ; v1@11.62,8.487 U1.18
  Bottom Layer w0.254: v1(11.557,8.319) 11.623,8.252 11.814,8.252 R10.1
NetC3_2: C3.2 U1.2 | length 2.4
  Top Layer w0.254: U1.2 12.92,16.963 13.589,17.631
  other v1: 13.906,17.631
NetC4_2: C4.2 U1.4 | length 3.5
  Top Layer w0.254: v1(11.545,18.277) 11.62,18.201 U1.4
  Bottom Layer w0.254: v1(11.545,18.277) 11.545,17.644 C4.2
NetC6_1: C6.1 R1.1 U1.7 | length 2.4
  Top Layer w0.254: v1@8.382,15.303 9.515,15.303 U1.7
  Bottom Layer w0.254: R1.1 7.6,15.303 C6.1@8.382,15.303
  other v1: 8.509,15.303
NetC7_2: C7.2 C8.2 L2.2 U1.25 | length 4.5
  Top Layer w0.254: U1.25 14.579,12.501 16.752,12.501 C8.2 C7.2 L2.2
NetC11_1: C11.1 C19.2 L4.2 L5.2 pad.3 | length 6.1
  Top Layer w0.3: 29.444,9.251 29.472,9.279 pad.3
  Top Layer w0.7: C11.1 25.886,9.229 L4.2 L5.2 C19.2 29.444,9.251
NetC11_2: C11.2 C18.2 L3.2 L4.1 | length 3.5
  Top Layer w0.7: L3.2 23.602,10.287 C18.2 24.743,10.307 C11.2 25.886,10.329 L4.1
NetC16_1: C16.1 L3.1 | length 1.1
  Top Layer w0.7: C16.1 L3.1
NetC16_2: C16.2 C20.2 L2.1 U1.22 | length 4.7
  Top Layer w0.3: U1.22 14.821,10.559 15.093,10.287 15.621,10.287 15.641,10.267
  Top Layer w0.7: 15.641,10.267 15.662,10.287 16.68,10.287 C20.2 L2.1 19.115,10.267 C16.2
NetC21_1: C21.1 C22.2 L8.1 | length 2.4
  Top Layer w0.7: C21.1 C22.2 38.826,9.806 40.032,9.806
NetC21_2: C21.2 pad.7 pad.8 | length 3.4
  Top Layer w0.3: pad.7 pad.8 35.115,9.779
  Top Layer w0.7: 35.115,9.779 C21.2
NetC23_2: C23.2 J1.1 L8.2 | length 5.4
  Top Layer w0.7: L8.2@41.593,9.63 41.593,8.616 C23.2 J1.1@41.636,4.23
NetC26_1: C26.1 L6.2 pad.11 | length 2.9
  Top Layer w0.3: pad.11 32.258,11.858 32.632,12.232 32.632,12.608 C26.1 32.777,12.774 32.777,13.832 L6.2
NetC27_2: C27.2 pad.10 Q4.D R4.1 R5.2 | length 6.9
  Top Layer w0.254: pad.10 33.39,11.154 34.79,12.554 34.79,12.565 35.009,12.784 35.009,13.885 35.03,13.906 R5.2@35.03,15.557 ; R4.1 35.157,15.706 R5.2@35.179,15.684
  other v1: 35.115,15.557
NetC32_2: C32.2 L9.1 U1.21 | length 3.3
  Top Layer w0.3: U1.21 13.571,9.162 13.97,8.763
  Top Layer w0.7: 13.97,8.763 14.521,8.212 C32.2 14.943,8.191 L9.1
NetC33_2: C33.2 C34.2 L9.2 | length 2.2
  Top Layer w0.7: L9.2 18.203,8.191 C33.2 19.367,8.17 C34.2
NetC34_1: C34.1 J2.1 | length 14.2
  Top Layer w0.7: C34.1 20.489,6.347 20.51,6.326 20.51,5.017 22.797,2.73 J2.1
NetL7_1: L7.1 pad.9 | length 4.4
  Top Layer w0.3: pad.9 33.908,10.279 34.666,11.037 34.666,11.251
  Top Layer w0.7: 34.666,11.251 34.859,11.444 36.864,11.444 L7.1
NetQ1_3: Q1.3 U1.5 | length 1.8
  Top Layer w0.254: Q1.3 10.262,16.784 10.685,16.361 10.822,16.361 10.971,16.212 U1.5
NetQ2_1: pad.1 R2.1 | length 2.7
  Top Layer w0.254: R2.1@30.67,12.763 30.72,12.714 30.72,12.46 30.988,12.192 30.988,10.281 30.986,10.279 pad.1
NetQ2_12: pad.12 R3.1 | length 3.7
  Top Layer w0.254: R3.1 31.222,13.863 31.758,13.327 pad.12
NSS: P1.6 U1.19 | length 8.6
  Top Layer w0.254: P1.6 7.239,5.078 7.239,6.466 7.81,7.038 11.163,7.038 12.271,8.145 U1.19
PDET: C28.2 pad.6@32.758,8.404 PDET.1 | length 7.6
  Top Layer w0.254: pad.6@32.758,8.404 32.758,8.15 32.76,8.148 33.264,8.148 33.411,8.001 34.125,8.001 34.272,8.148 C28.2@34.745,8.148 ; C28.2@34.745,8.187 C28.2@34.745,8.148 ; C28.2 34.776,8.148 C28.2@34.745,8.148 ; PDET.1 34.988,5.715 34.969,5.715 34.745,5.939 C28.2@34.745,8.148
RXTX: C38.1 Q4.G RXTX.1 U1.20 | length 71.8
  Top Layer w0.254: RXTX.1@12.92,3.556 U1.20 ; RXTX.1 12.004,2.416 11.496,2.416 11.435,2.476 10.096,2.476 10.025,2.405 9.78,2.405 9.281,1.907 7.976,1.907 7.339,1.27 5.29,1.27 5.106,1.086 2.971,1.086 0.445,3.612 0.445,18.286 2.86,20.701 22.987,20.701 24.32,19.367 33.965,19.367 34.114,19.219 34.114,19.185 C38.1 34.163,18.838 v1(34.163,18.098)
SCK: P1.2 R12.1 U1.16 | length 10.2
  Top Layer w0.254: P1.2 3.302,5.141 3.302,6.88 3.627,7.205 3.698,7.205 5.326,8.832 9.868,8.832 10.148,9.112 10.148,9.124 10.321,9.297 U1.16
pads on no net: Q1.1 Q3.4 U1.1 U1.6 U1.9 U1.10 U1.11 U1.12 U1.13 U1.27 U1.28
copper on no net: | length 0.7
  Top Layer w0.254: 5.308,10.089 5.676,10.089 v1(5.905,9.86)

## Polygon pours and split planes (outlines as drawn)
GND on Bottom Layer "GND_L02_P002" (solid, remove dead copper, pour order 2): 0,21.082 44.641,21.082 44.641,0.127 44.514,0.254 0,0.254
GND on Top Layer "GND_L01_P001" (solid, remove dead copper, pour order 1): 0,21.082 44.641,21.082 44.704,21.019 44.704,0.063 0,0.063

## Other copper
Top Layer:
  region net GND: 42.802,6.474 44.707,6.485 44.701,7.485 42.796,7.474
  rectangle net GND: 35.115,6.477 40.481,7.477
  rectangle net GND: 24.765,6.413 34.353,7.414
  region net GND: 25.829,12.192 25.829,18.925 24.828,18.925 24.828,12.192
  region net GND: 44.688,7.429 44.688,20.193 43.688,20.193 43.688,7.429
  rectangle net GND: 24.765,20.066 44.704,21.066

## Silkscreen, mask and mechanical layers (free items; w line width, h text height)
Top Overlay:
  circle w0.25: c29.527,10.604 r0.125
  circle w0.25: c43.307,7.556 r0.125
  circle w0.25: c22.796,7.429 r0.125
  lines w0.153: 30.608,8.778 30.608,8.729 31.208,8.129 31.256,8.129 ; 30.608,10.781 30.608,10.829 31.208,11.429 31.256,11.429 ; 33.259,8.129 33.308,8.129 33.908,8.729 33.908,8.778 ; 33.259,11.429 33.308,11.429 33.908,10.829 33.908,10.781
  lines w0.254: -0.064,21.145 44.64,21.145
Top Paste:
  circle w0.5: c8.319,1.079 r0.25
Bottom Paste:
  circle w0.5: c8.319,1.079 r0.25
Top Solder:
  region: 42.802,6.474 44.707,6.485 44.701,7.485 42.796,7.474
  region: 44.688,7.429 44.688,20.193 43.688,20.193 43.688,7.429
  rectangle: 35.115,6.477 40.481,7.477
  rectangle: 24.765,6.477 34.353,7.477
  rectangle: 24.747,20.065 44.686,21.065
  region: 25.85,12.129 25.85,18.987 24.85,18.987 24.85,12.129
Mechanical 13:
  circle w0.1: c31.658,10.379 r0.5
  lines w0.1: 30.758,8.879 31.358,8.279 33.158,8.279 33.758,8.879 33.758,10.679 33.158,11.279 31.358,11.279 30.758,10.679 30.758,8.879
Mechanical 15:
  lines w0.05: 30.183,7.704 30.183,11.854 34.333,11.854 34.333,7.704 30.183,7.704
  lines w0.1: 31.758,9.779 32.758,9.779 ; 32.258,9.279 32.258,10.279